# Altium PCB SA100001-FTRAP.PcbDoc
Units mm, origin at the board's own origin, x right, y up, seen from the top; angles counter-clockwise.
Board outline 33 x 14 mm, 2 copper layers (Top Layer, Bottom Layer); 31 components, 28 nets, 108 pads, 0 vias.
Unrouted connection lines stored in the file: 65.
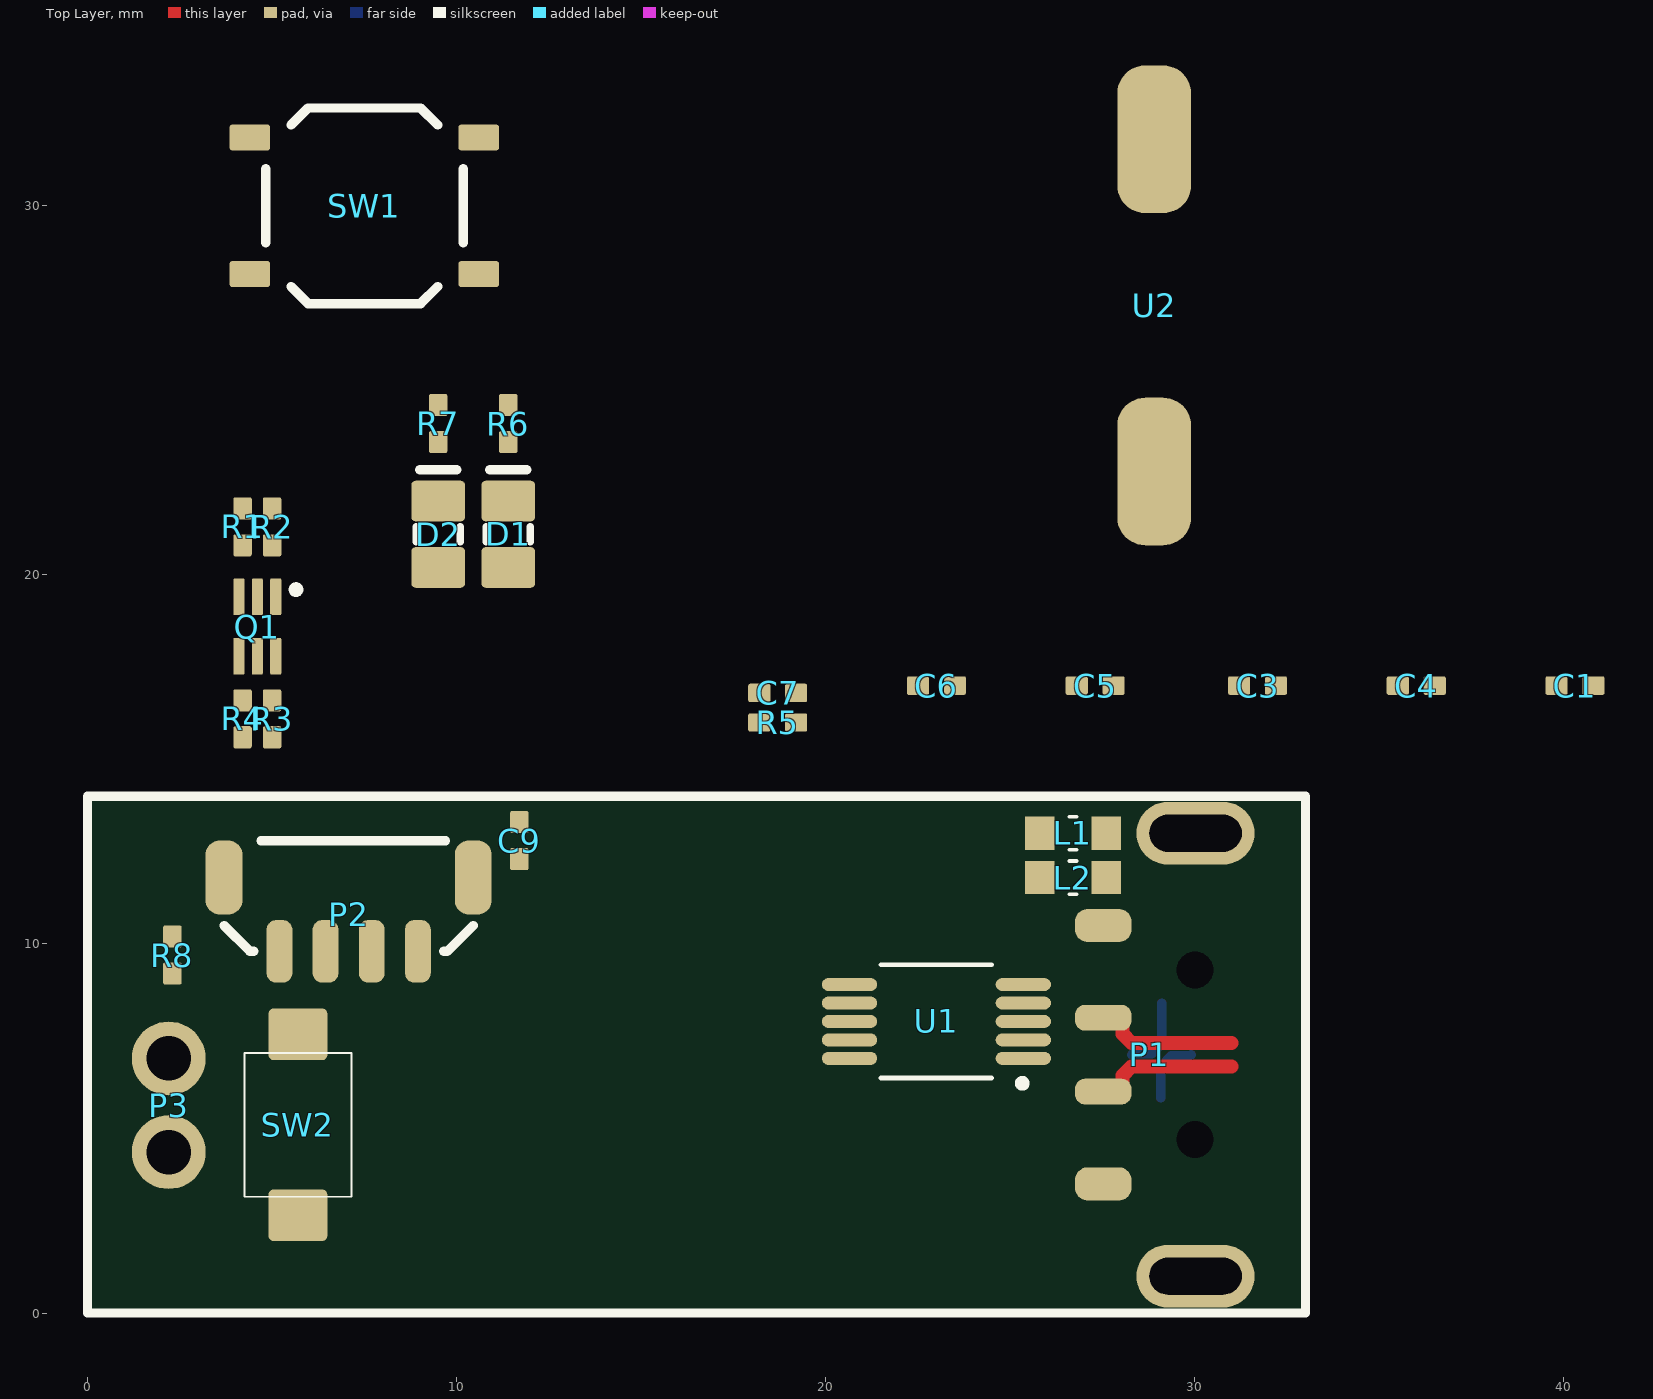
[diagram p0: Top Layer view]
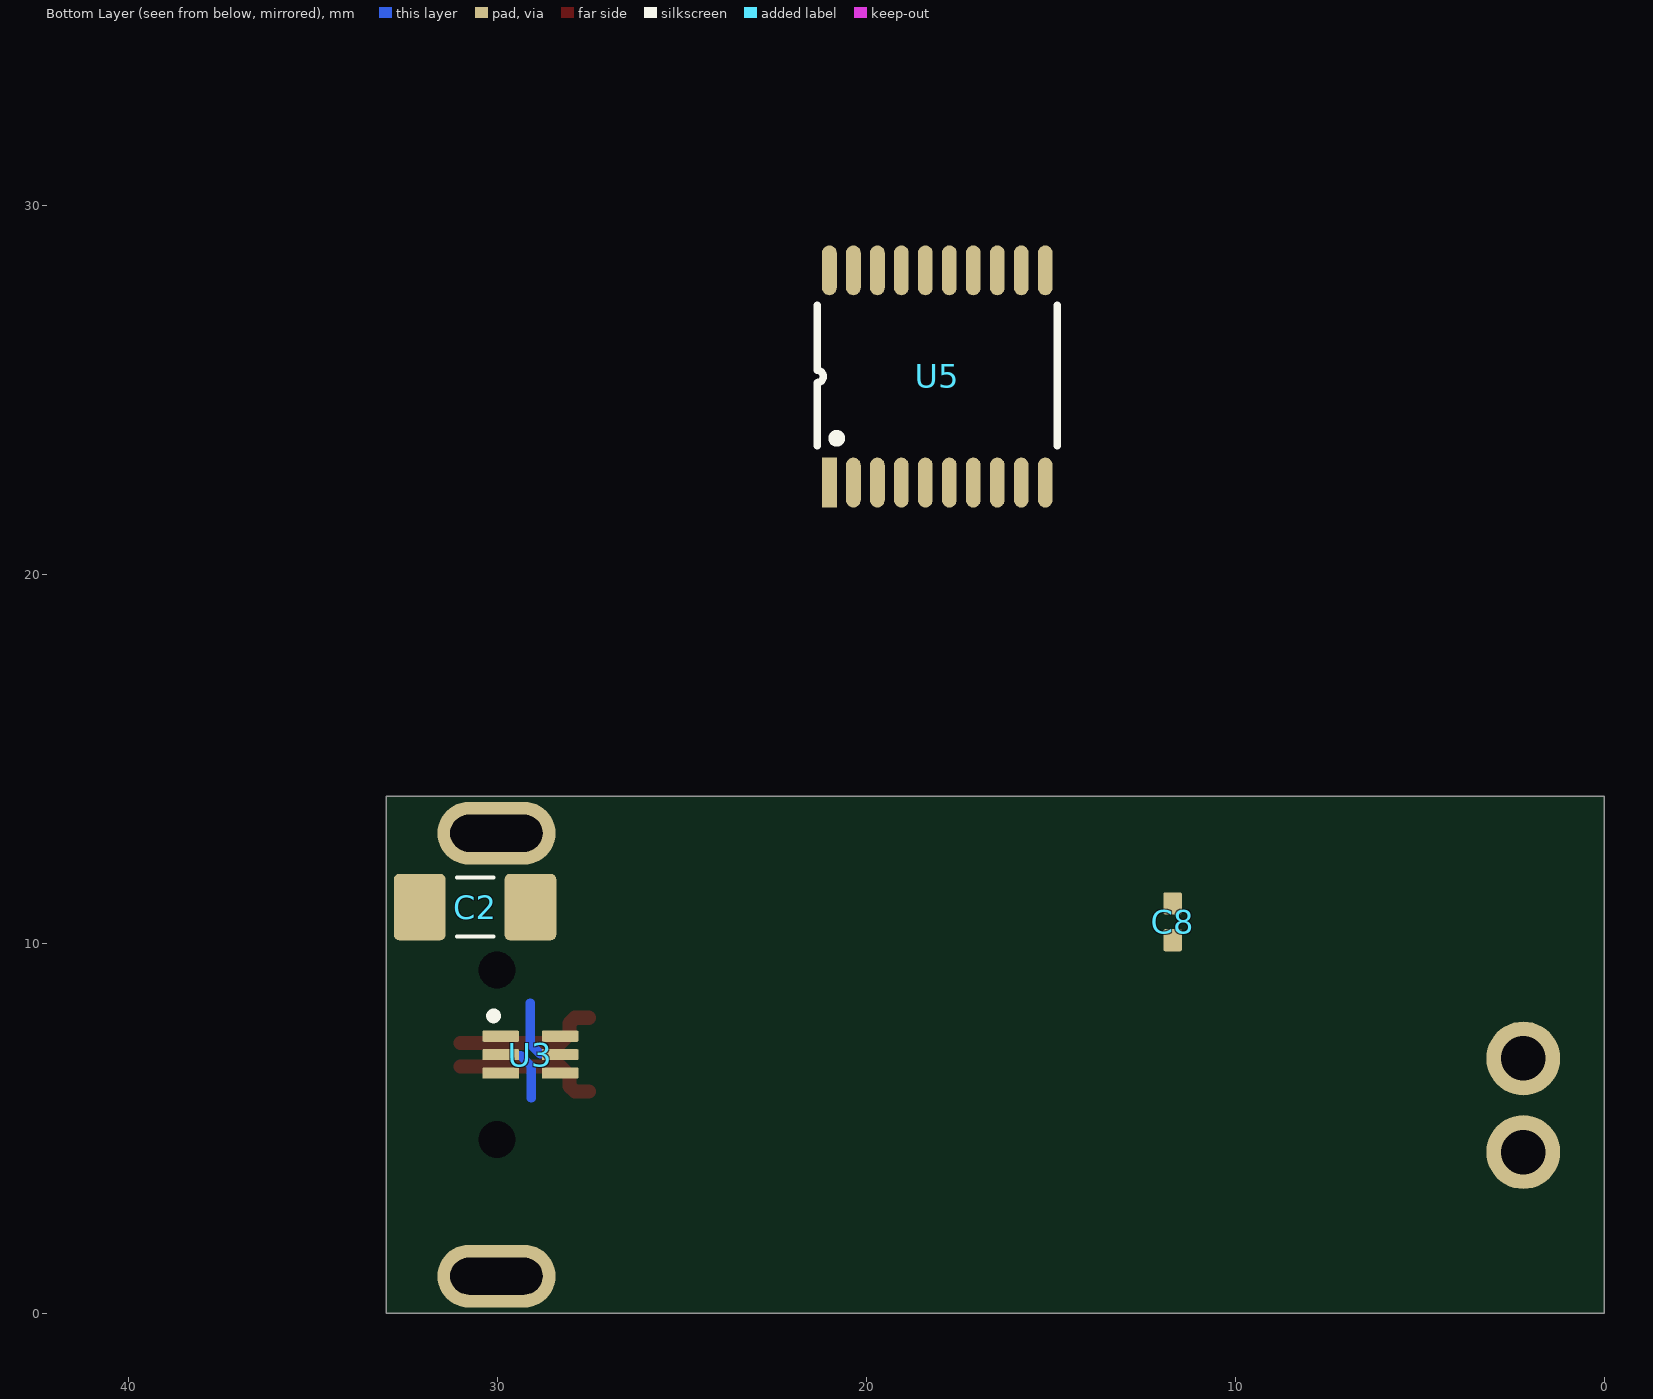
[diagram p1: Bottom Layer view, seen from below]

## Layer stack, top to bottom
Top Solder: solder mask 0.0102, Solder Resist, Dk 3.5
Top Layer: signal copper 0.0356
Dielectric 1: dielectric 0.32, FR-4, Dk 4.8
Bottom Layer: signal copper 0.0356
Bottom Solder: solder mask 0.0102, Solder Resist, Dk 3.5

## Board outline
0,0 33,0 33,14 0,14

## Design rules (kind name [scope] priority, off if disabled: settings)
Clearance [All] p1: gap=0.15 ignorepadtopadclearanceinfootprint=FALSE except(0: Arc-Hole Track-Hole SMDPad-Hole THPad-Hole Via-Hole Fill-Hole Poly-Hole Region-Hole Text-Hole; 0.254: SMDPad-Fill SMDPad-Poly SMDPad-Region)
DiffPairsRouting [All] p1: maxlimit=0.254 minlimit=0.254 mostfreqgap=0.254 toplayer_minwidth=0.381 toplayer_maxwidth=0.381 toplayer_prefwidth=0.381 bottomlayer_minwidth=0.381 bottomlayer_maxwidth=0.381 bottomlayer_prefwidth=0.381 maxuncoupledlength=12.7
PolygonConnect [All] p1: connectstyle=Relief reliefconductorwidth=0.254 reliefentries=4 polygonreliefangle="90 Angle" airgapwidth=0.254
RoutingVias [All] p1: holewidth=0.711 width=1.27 viastyle="Through Hole" minholewidth=0.711 minwidth=1.27 maxholewidth=0.711 maxwidth=1.27
SolderMaskExpansion [All] p1: expansion=0.102 istentingtop=FALSE
Width [All] p1: maxlimit=5 minlimit=0.254 preferedwidth=0.254 bottomlayer_maxwidth=4 minimp=50.000000 maximp=50.000000 favimp=50.000000
29 further rules are at their usual default settings.

## Classes and differential pairs
differential pair class USB: D0 D1
differential pair D0: +D0_P -D0_N
differential pair D1: +D1_P -D1_N

## Components (designator, comment, footprint, x,y, rotation, side; value= is the part's Value field where it differs from the comment)
C1 "100nF" C0402_NOSILK 40.3,17 r180 top
C2 "1nF" C1206 30.6,11 r180 bottom
C3 "100nF" C0402_NOSILK 31.7,17 r180 top
C4 "100nF" C0402_NOSILK 36,17 r180 top
C5 "100nF" C0402_NOSILK 27.3,17 r180 top
C6 "100nF" C0402_NOSILK 23,17 r180 top
C7 "100nF" C0402_NOSILK 18.7,16.8 r180 top
C8 "100nF" C0402_NOSILK 11.7,10.6 r270 bottom
C9 "100nF" C0402_NOSILK 11.7,12.8 r270 top
D1 "LED" LED_0805 11.4,21.1 r270 top
D2 "LED" LED_0805 9.5,21.1 r270 top
L1 "" L0603 26.7,13 r180 top
L2 "" L0603 26.7,11.8 r180 top
P1 "440247-2" "USB A type r/a male SMT" 29.02,7 r90 top
P2 "NX1251-04SMR" NX1251-04SMR 5.2,9.8 r90 top
P3 "HEADER 1x2" "HEADER 1x2 2.54" 2.2,5.63 r180 top
Q1 "2N7002BKV.115" SOT-666 4.6,18.6 r0 top
R1 "=Value" R0402_NOSILK 4.2,21.3 r270 top
R2 "=Value" R0402_NOSILK 5,21.3 r90 top
R3 "=Value" R0402_NOSILK 5,16.1 r90 top
R4 "=Value" R0402_NOSILK 4.2,16.1 r270 top
R5 "=Value" R0402_NOSILK 18.7,16 r0 top
R6 "=Value" R0402_NOSILK 11.4,24.1 r90 top
R7 "=Value" R0402_NOSILK 9.5,24.1 r90 top
R8 "=Value" R0402_NOSILK 2.3,9.7 r90 top
SW1 "SWITCH_GEN_4P" SW_4x4x1.5 7.5,30 r0 top
SW2 "SWITCH_GEN_2P" SW_3x4x2 5.7,5.1 r90 top
U1 "CH340E" MSOP-10 23,7.9 r180 top
U2 "HCS0905H" HCS09H 28.9,27.3 r0 top
U3 "USBLC6-2" SOT-666 29.1,7 r90 bottom
U5 "STM8S003F3" TSSOP20-6.5x4.4-0.65p 21,22.5 r90 bottom

## Footprints (in the part's own frame and the unit in brackets; to place one, negate y for a bottom-side part, rotate by r counter-clockwise, add the part's x,y. Pads: shape width x height; smd on the part's side, far side on the other; paste and mask are expansions set on the pad)
C0402_NOSILK [mm]
  rrect20% 0.6x0.5 smd: 1(-0.5,0) 2(0.5,0)
  body extent -0.49,-0.25 0.49,0.25, height 0.55
C1206 [mm]
  rrect20% 1.4x1.8 smd: 1(-1.5,0) 2(1.5,0)
  silkscreen extent -0.5,-0.8 0.5,0.8, body extent -1.6,-0.8 1.6,0.8, height 1.3
HCS09H [mm]
  rrect75% 2x4 smd: 1(0,4.5) 2(0,-4.5)
  body extent -4.5,-4.5 6,4.5, height 4
"HEADER 1x2 2.54" [mm]
  round 2 hole 1.2: 1(0,1.27) 2(0,-1.27)
  body extent -1.3,-2.47 1.3,2.47, height 11.8
L0603 [mm]
  rect 0.8x0.9 smd: 1(-0.9,0) 2(0.9,0)
  silkscreen extent -0.1,-0.45 0.1,0.45, body extent -0.8,-0.4 0.8,0.4, height 0.4
LED_0805 [mm]
  rrect20% 1.1x1.45 smd: A(0.9,0) C(-0.9,0)
  silkscreen extent -1.75,-0.6 0.2,0.6, body extent -1.01,-0.62 1.01,0.63, height 1.1
MSOP-10 [mm]
  rrect100% 1.5x0.35 smd: 1(-2.355,1) 2(-2.355,0.5) 3(-2.355,0) 4(-2.355,-0.5) 5(-2.355,-1) 6(2.355,-1) 7(2.355,-0.5) 8(2.355,0) 9(2.355,0.5) 10(2.355,1)
  silkscreen extent -2.43,-1.53 1.5,1.77, body extent -2.51,-1.5 2.51,1.5, height 1.05
NX1251-04SMR [mm]
  rrect75% 1.7x0.7 smd: 1(0,0) 2(0,-1.25) 3(0,-2.5) 4(0,-3.75)
  rrect75% 2x1 smd: 5(2,1.5) 6(2,-5.25)
  silkscreen extent 0,-5.25 3,1.5
R0402_NOSILK [mm]
  rrect20% 0.6x0.5 smd: 1(-0.5,0) 2(0.5,0)
  body extent -0.5,-0.25 0.5,0.25, height 0.35
SOT-666 [mm]
  rrect20% 0.3x0.99 smd: 1(0.5,0.805) 2(0,0.805) 3(-0.5,0.805) 4(-0.5,-0.805) 5(0,-0.805) 6(0.5,-0.805)
  silkscreen extent 0.95,0.9 1.15,1.1, body extent -0.8,-0.8 0.8,0.8, height 0.6
SW_3x4x2 [mm]
  rrect20% 1.4x1.6 smd: 1(-2.45,0) 2(2.45,0)
  silkscreen extent -1.95,-1.45 1.95,1.45, body extent -2.45,-1.45 2.45,1.45, height 2
SW_4x4x1.5 [mm]
  rrect20% 1.1x0.7 smd: 1(-3.1,-1.85) 2(-3.1,1.85) 3(3.1,-1.85) 4(3.1,1.85)
  silkscreen extent -2.68,-2.65 2.68,2.65, body extent -3.2,-2.65 3.2,2.65, height 1.55
TSSOP20-6.5x4.4-0.65p [mm]
  rect 1.35x0.4 smd: 1(0,0)
  oval 1.35x0.4 smd: 2(0,-0.65) 3(0,-1.3) 4(0,-1.95) 5(0,-2.6) 6(0,-3.25) 7(0,-3.9) 8(0,-4.55) 9(0,-5.2) 10(0,-5.85) 11(5.75,-5.85) 12(5.75,-5.2) 13(5.75,-4.55) 14(5.75,-3.9) 15(5.75,-3.25) 16(5.75,-2.6) 17(5.75,-1.95) 18(5.75,-1.3) 19(5.75,-0.65) 20(5.75,0)
  silkscreen extent 1,-6.18 4.8,0.33, body extent -0.3,-6.27 5.98,0.23, height 1.1
"USB A type r/a male SMT" [mm]
  rrect75% 0.9x1.524 smd: 1(3.5,1.5) 4(-3.5,1.5)
  rrect75% 0.7x1.524 smd: 2(1,1.5) 3(-1,1.5)
  round 0.8 hole 1 unplated mask+0: None(-2.3,-0.98) None(2.3,-0.98)
  oval 1.7x3.2 hole 1 slot 2.5 at 90 deg mask+0: SHIELD(-6,-1) SHIELD(6,-1)
  body extent -6.3,-18.68 6.3,1.62, height 3.15

## Part data
C1 C3 C4 C5 C6 C7 C8 C9: library part C0402_100nF_16V, "Ceramic capacitor", Voltage=16V, Capacity=100nF, PriceRCSUAH=0,2, RCS=https://www.rcscomponents.kiev.ua/product/100nf-16v-10-x7r-0402-cl05b104ko5nnnc-samsung_103686.html, Size=0402
C2: library part C1206_1nF_2KV, "Ceramic capacitor", Voltage=2KV, Capacity=1nF, PriceRCSUAH=1,7, RCS=https://www.rcscomponents.kiev.ua/product/1nf-2000v-x7r-10-1206-3k-reel-1206b102k202n3-hitano-kondensatory-keramicheskie-smd_11455.html, Size=1206
D1 D2: "Led General", Package="0805 Dialight", Availability=Unavailable, MF=Dialight, MP=598-8140-107F, Owned=3000, Price=None, SnapEDA_Link=https://www.snapeda.com/parts/598-8140-107F/Dialight/view-part/?ref=snap
L1 L2: library part L_0603_100nH_0.5A, "Inductor Generic", Current=0.5A, Inductivity=100nH, Size=0603
P1: library part CON-USB-A, "Mini/Micro USB B Type RCPT", Package=None, Availability=Unavailable, Kosmodrom=http://www.kosmodrom.com.ua/, Price=None, PriceKosmodromUAH=0
Q1: "60 V, 340 mA dual N-channel Trench MOSFET", Kosmodrom=http://www.kosmodrom.com.ua/el.php?name=2N7002BKV.115, PriceKosmodromUAH=3.5
R1 R3: library part R0402_1K, "Resistor General", Resistance=1K, Tolerance=5%, Size=0402
R2 R4: library part R0402_100K, "Resistor General", Resistance=100K, Tolerance=5%, Size=0402
R5 R8: library part R0402_10K, "Resistor General", Resistance=10K, Tolerance=5%, Size=0402
R6 R7: library part R0402_330R, "Resistor General", Resistance=330R, Tolerance=5%, Size=0402
SW1 SW2: "SWITCH DIP 4.3 mm"
  SW1: Kosmodrom=http://www.kosmodrom.com.ua/el.php?name=TACT-5X5X1.5, PriceKosmodromUAH=0,5
  SW2: Kosmodrom=http://www.kosmodrom.com.ua/el.php?name=TACT-35N-F, PriceKosmodromUAH=1,25
U2: "5V Buzzer GEN"
U3: "Very low capacitance ESD protection", Kosmodrom=http://www.kosmodrom.com.ua/el.php?name=USBLC6-2P6, PriceKosmodromUAH=4,25
U5: "Cheap 8bit MCU"
P2: Kosmodrom=http://www.kosmodrom.com.ua/el.php?name=NX1251-04SMR, PriceKosmodromUAH=5.5

## Nets (pads, with @x,y where several pads share a name; then routed paths per layer and width w, separated by ;. In a path a pad name is that pad's centre, name@x,y a point inside that pad or via, vN(x,y) a via of type N, cw(c..) or ccw(c..) an arc to the next point about the centre after c; other vN are vias at no path point)
BUZ: R1.1
BUZ*: Q1.6 U2.2
CTS#: U1.5
D0_N: P1.2 U3.1 | length 3.9
  Top Layer w0.381: P1.2 27.893,8 28.047,7.846 28.047,7.559 28.288,7.317 31,7.317
D0_P: P1.3 U3.3 | length 3.9
  Top Layer w0.381: P1.3 27.893,6 28.047,6.154 28.047,6.441 28.288,6.682 31,6.682
D1_N: U1.2 U3.6
D1_P: U1.1 U3.4
EXT: R3.1
EXT*: P3.2 Q1.3
G1: Q1.2 R1.2 R2.1
G2: Q1.5 R3.2 R4.1
GND: C1.1 C2.1 C3.1 C4.1 C5.1 C6.1 C7.1 C8.1 C9.2 P1.4 P1.SHIELD P2.3 P2.5 P2.6 P3.1 R2.2 R4.2 R6.2 R7.2 SW1.1 SW1.3 SW2.1 U1.3 U2.1 U3.2 U5.7 | length 2
  Top Layer w1: P1.SHIELD@29.886,12.866 P1.SHIELD@30.02,13
  Bottom Layer w0.254: 29.075,5.825 29.075,6.689 29.363,6.977 29.882,6.977 U3.2
LED1: D1.A
LED2: D2.A
NetC4_2: C4.2 U1.10
NetC7_2: C7.2 R5.1 SW1.2 SW1.4
NetD1_C: D1.C R6.1
NetD2_C: D2.C R7.1
NRST: C9.1 P2.4 R8.1 SW2.2 U5.4
RTS#: U1.4
RXD: U1.9 U5.2
SWIM: P2.2 U5.18
TAMP: R5.2
TNOW: U1.6
TXD: U1.8 U5.3
VBUS: C2.2 L1.1 L2.1 P1.1 U3.5 | length 2
  Bottom Layer w0.254: U3.5 28.318,7.023 28.837,7.023 29.1,7.286 29.1,8.4
VCAP: C8.2 U5.8
VCC: C1.2 C3.2 C5.2 C6.2 L1.2 L2.2 P2.1 Q1.1 Q1.4 R8.2 U1.7 U5.9
pads on no net: P1.None U5.1 U5.5 U5.6 U5.10 U5.11 U5.12 U5.13 U5.14 U5.15 U5.16 U5.17 U5.19 U5.20

## Silkscreen, mask and mechanical layers (free items; w line width, h text height)
Top Overlay:
  the board outline again, w0.254